# Altium PCB FlightController.PcbDoc
Units mm, origin at the board's own origin, x right, y up, seen from the top; angles counter-clockwise.
Board outline 33 x 33 mm, 4 copper layers (Top Layer, Layer 2, Layer 3, Bottom Layer), stack 0.603 mm thick; 42 components, 42 nets, 206 pads, 88 vias.
Unrouted connection lines stored in the file: 25.
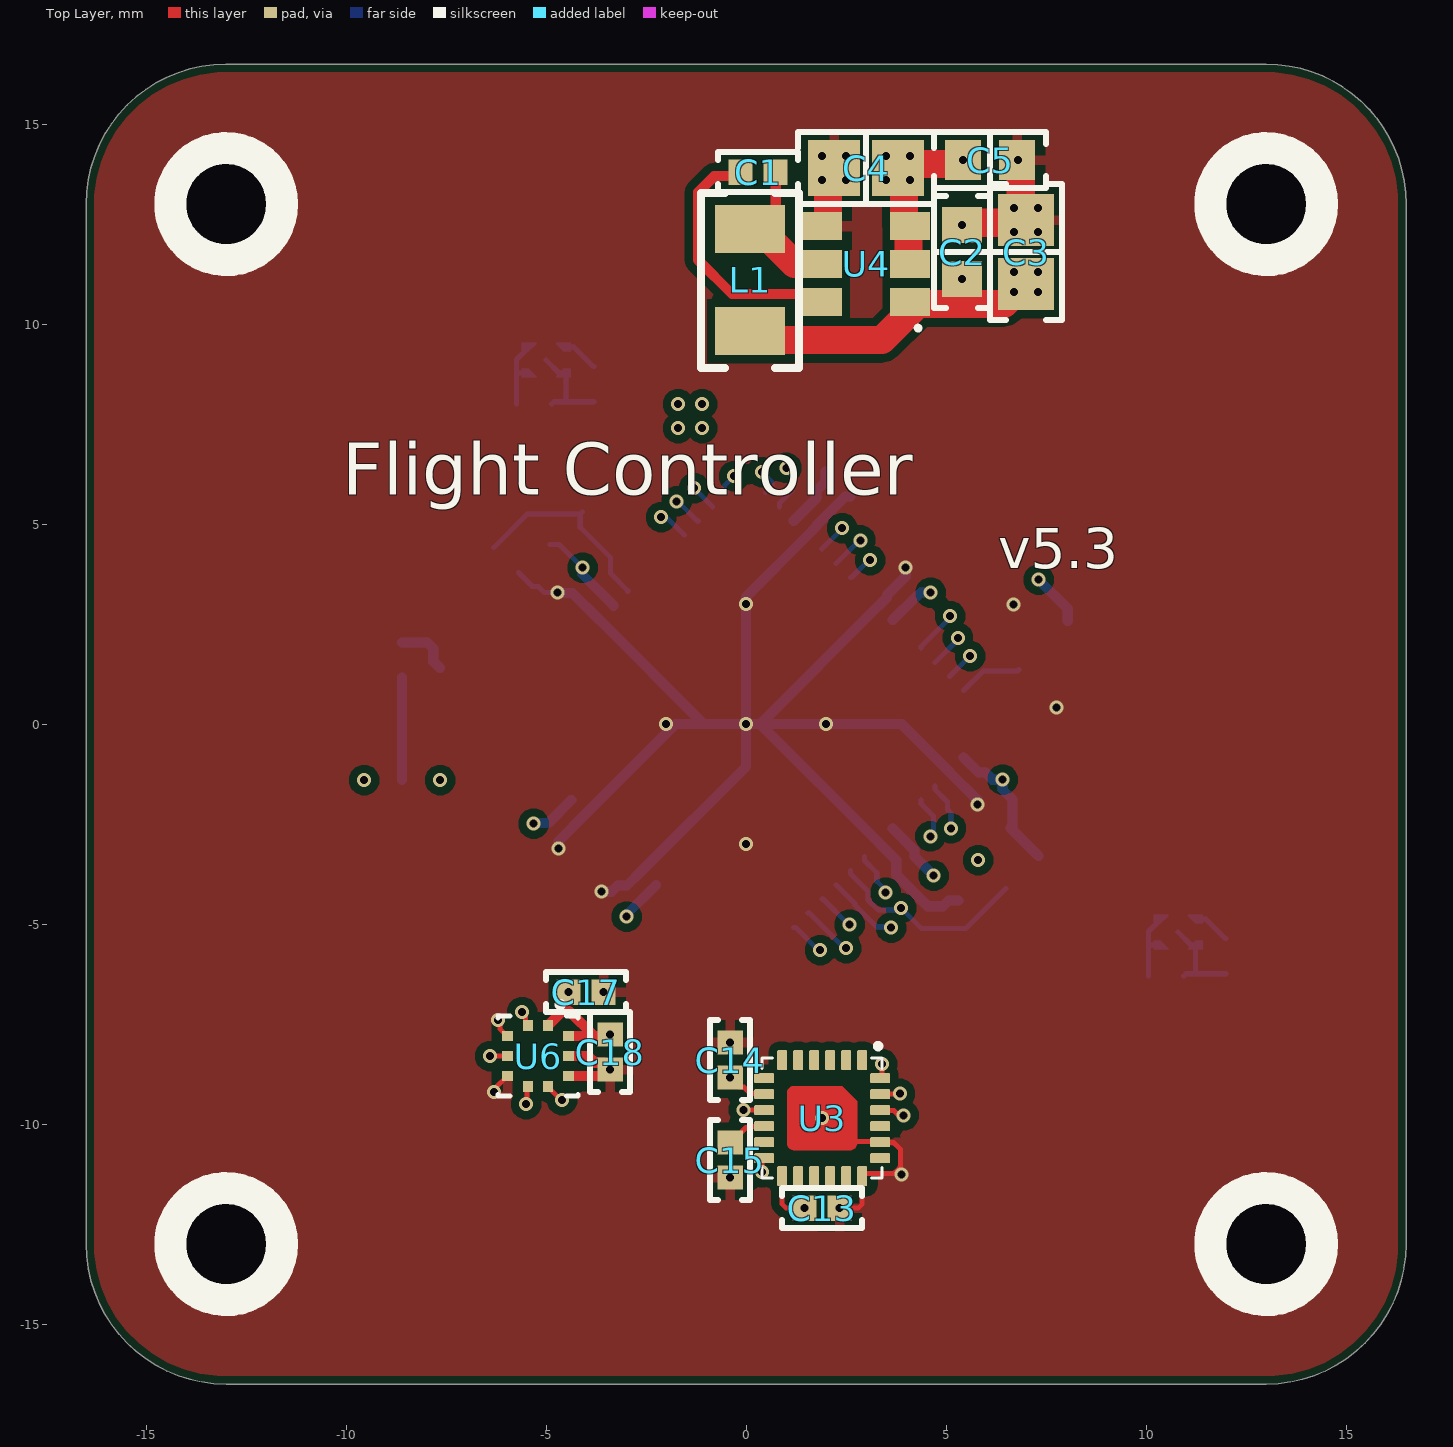
[diagram p0: Top Layer view]
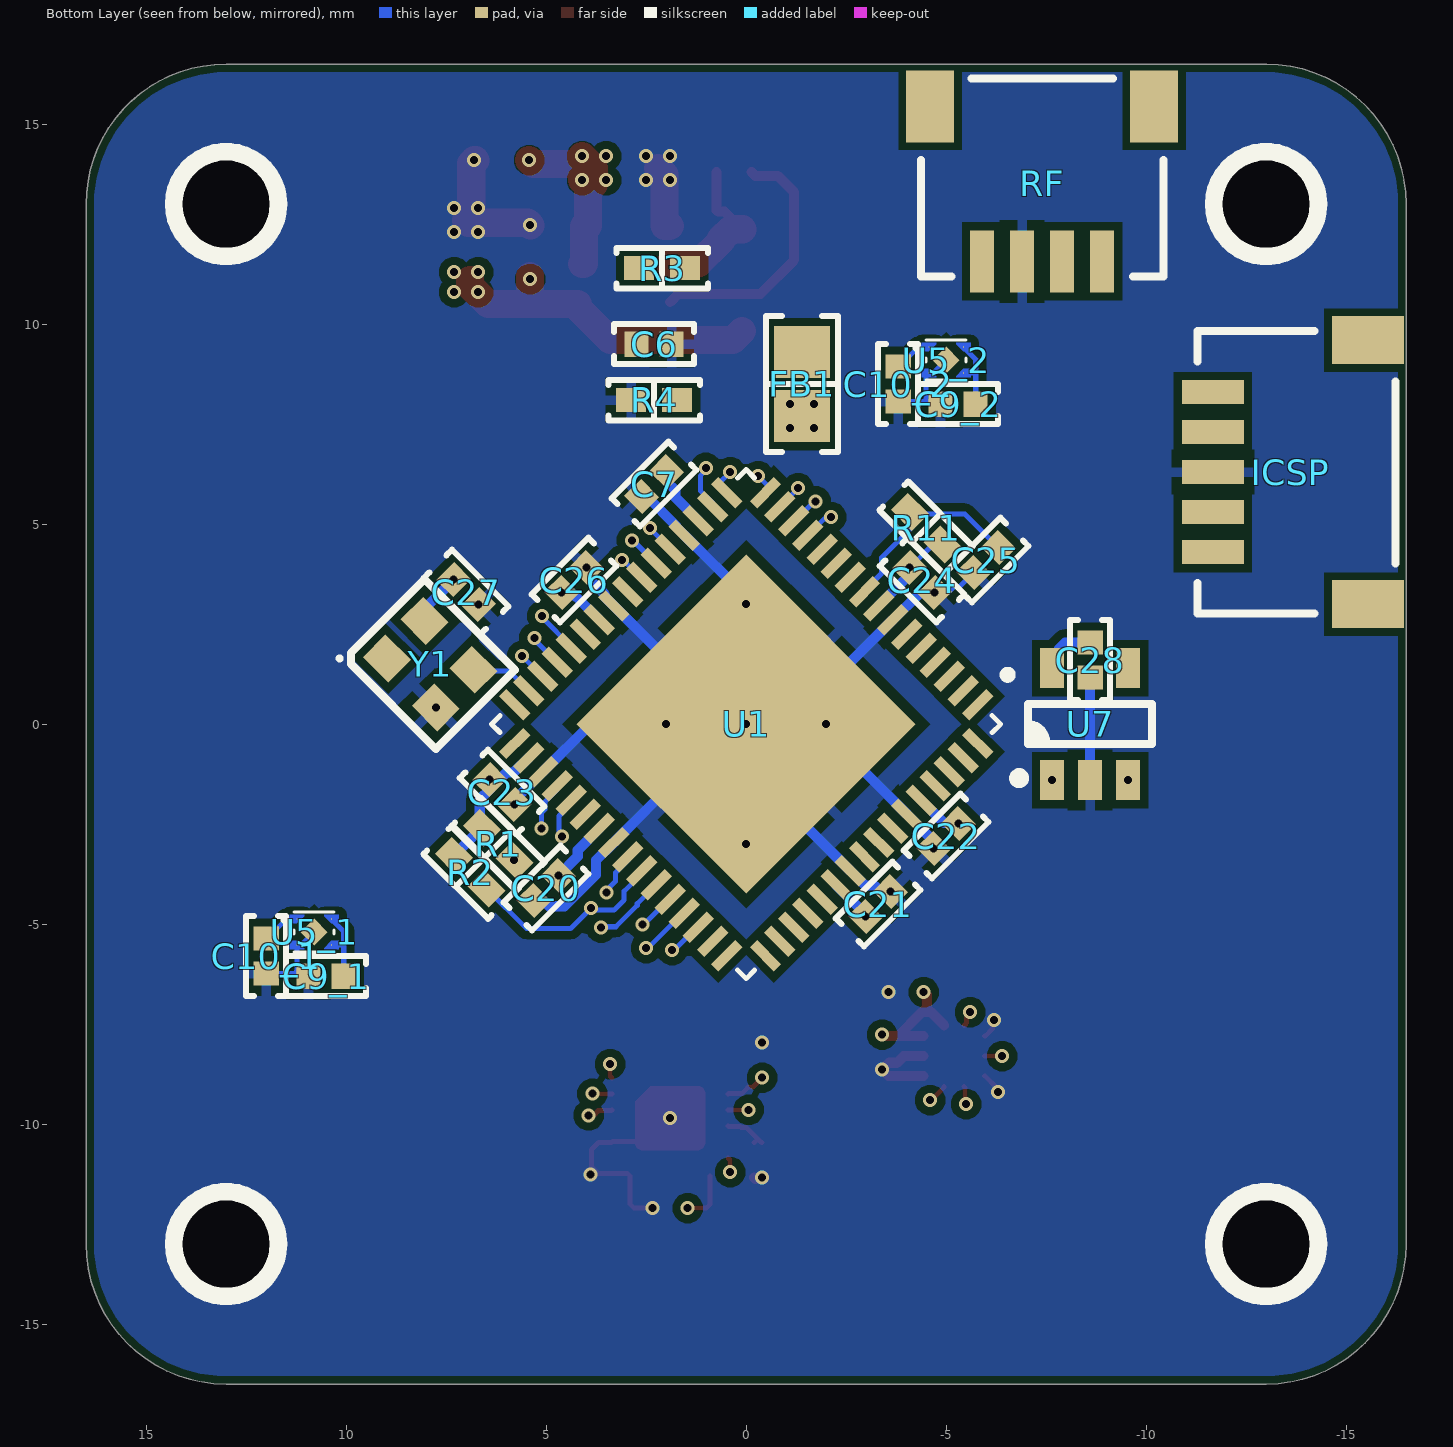
[diagram p1: Bottom Layer view, seen from below]
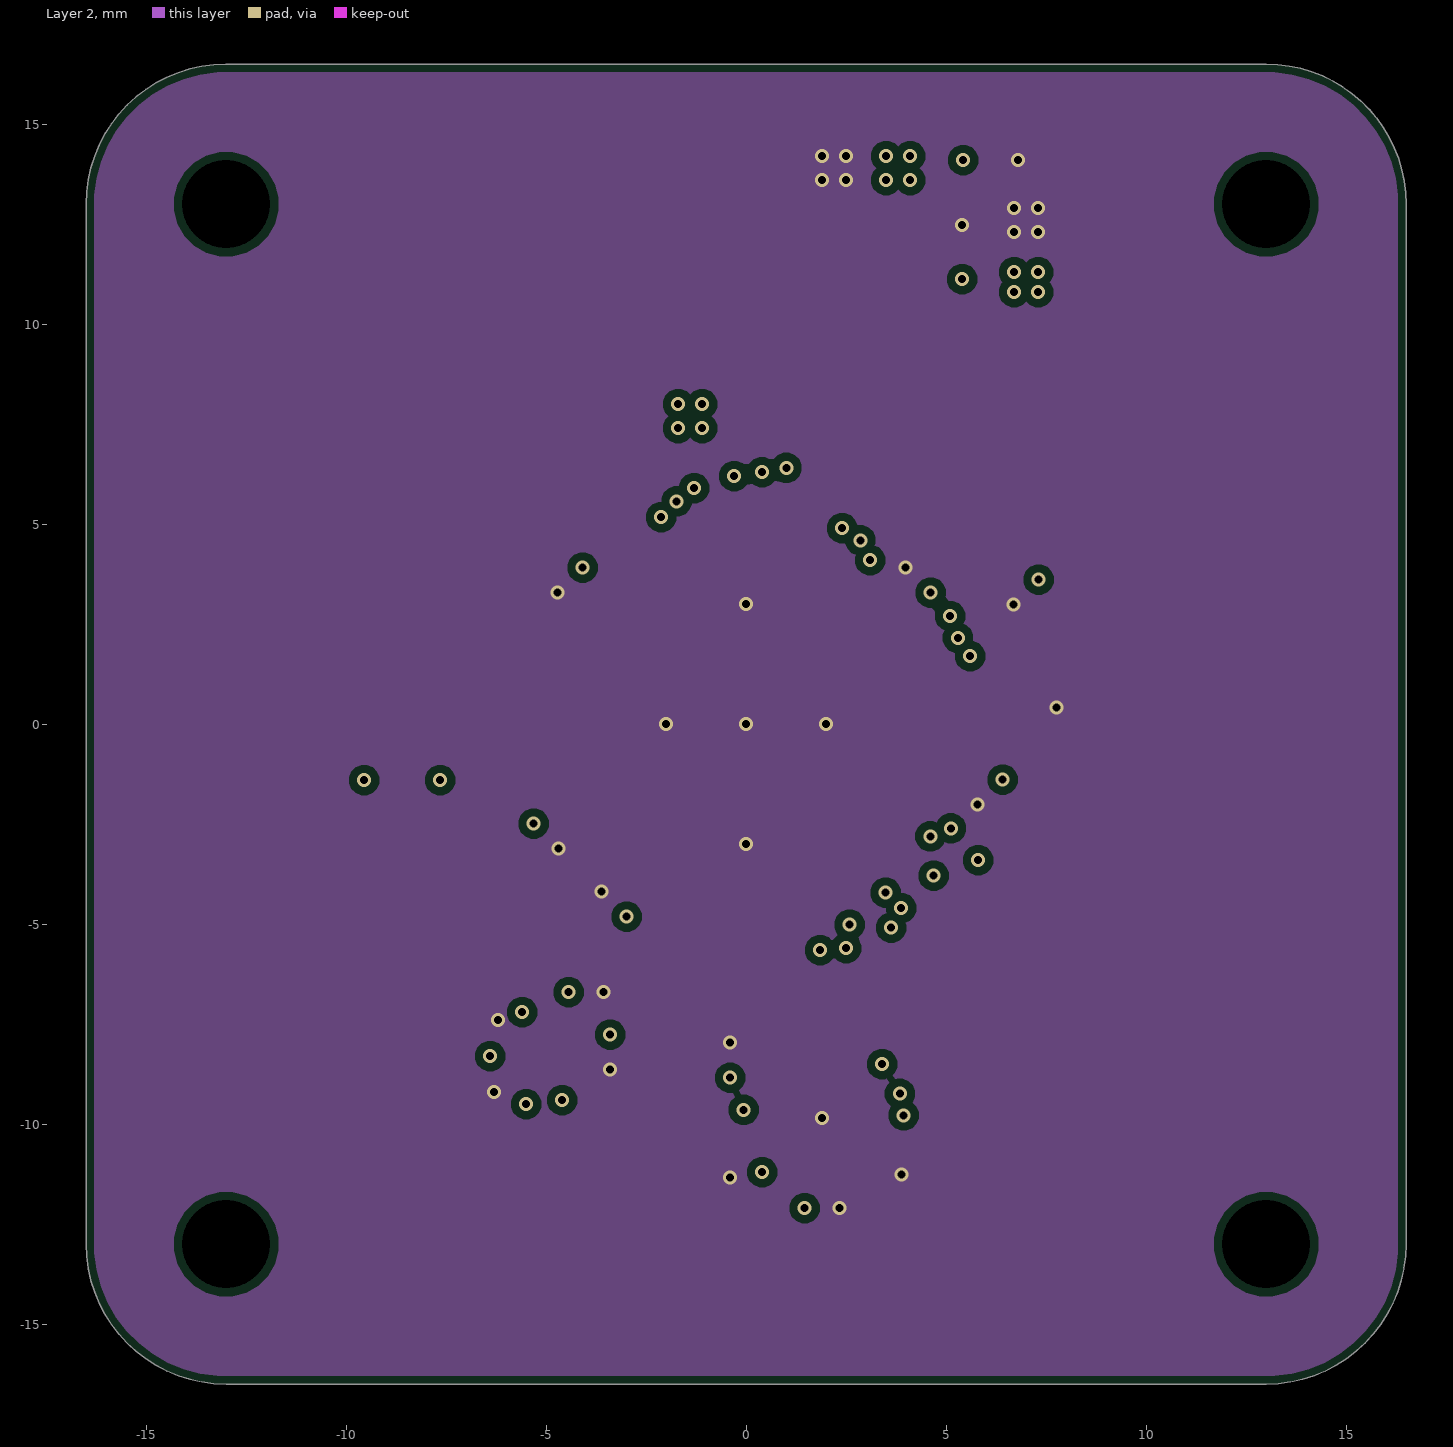
[diagram p2: Layer 2]
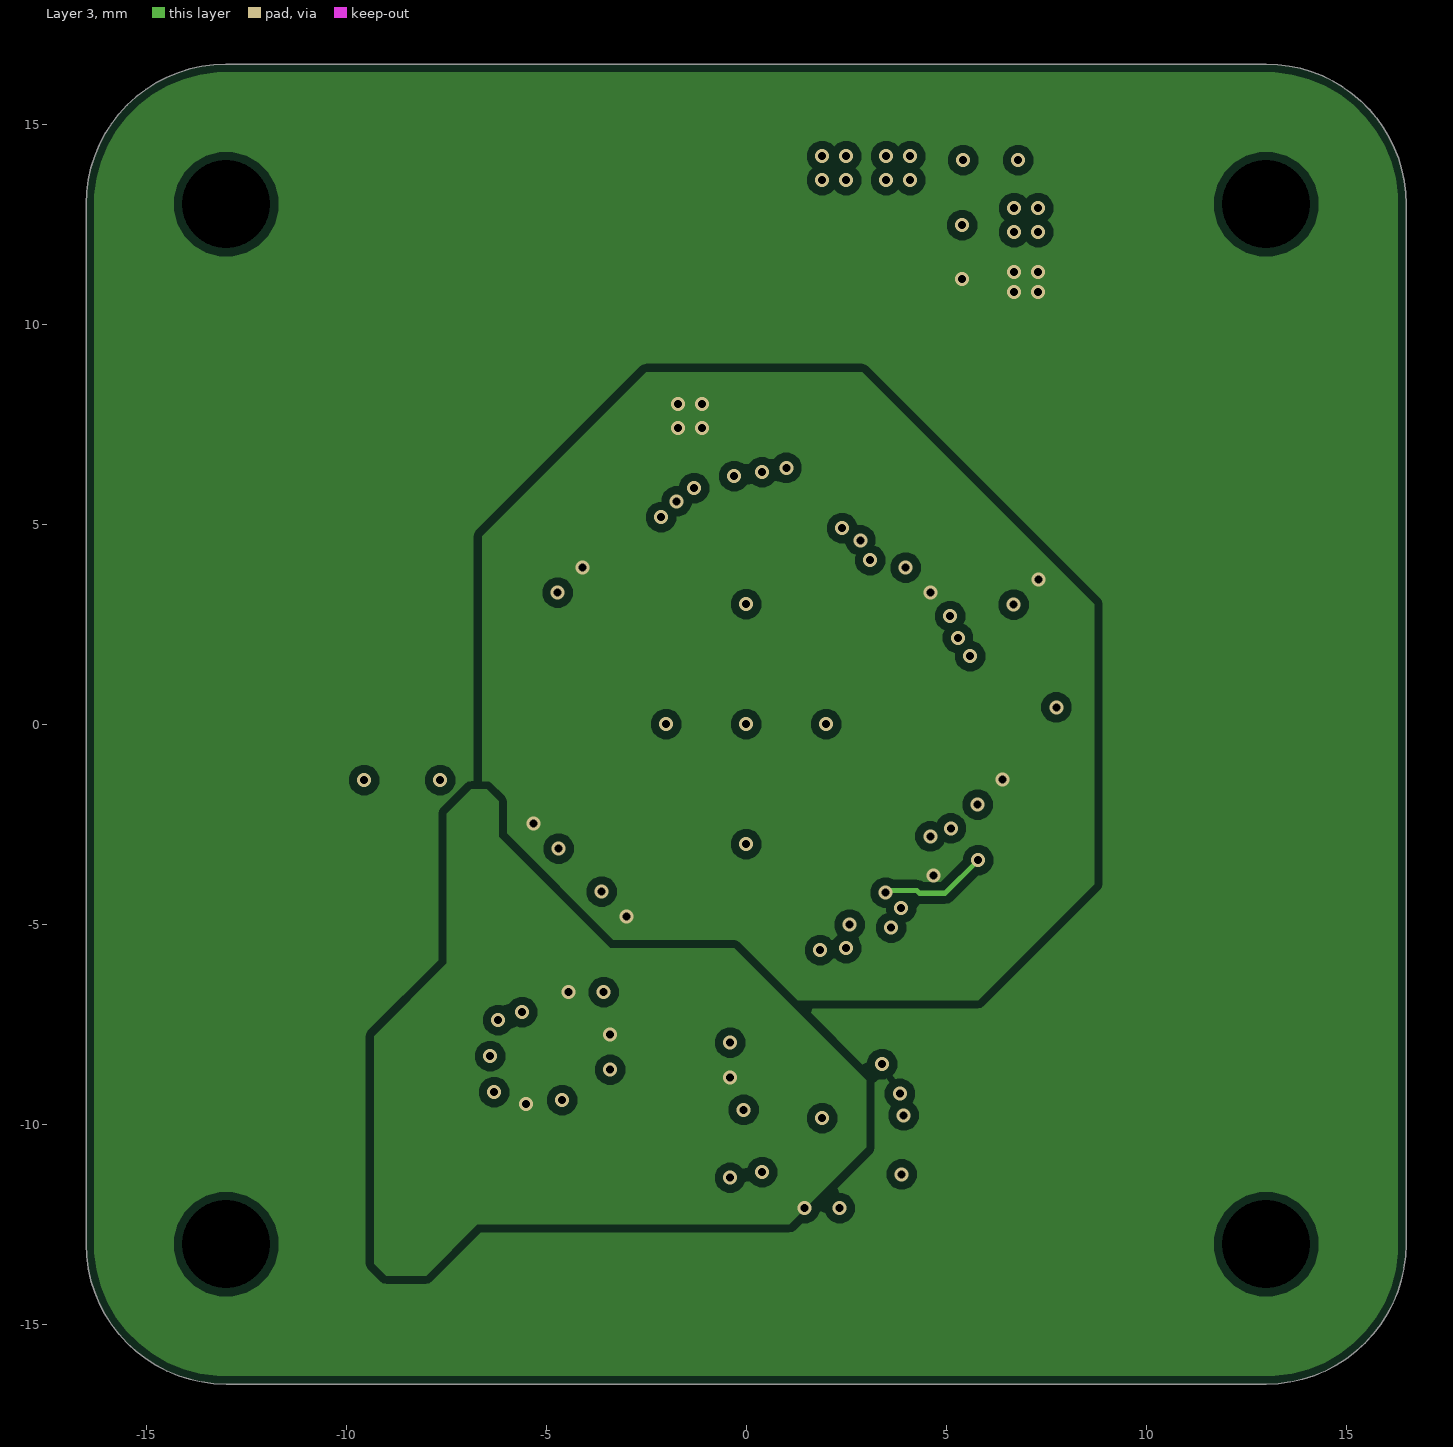
[diagram p3: Layer 3]

## Layer stack, top to bottom
Top Solder: solder mask 0.0102, Solder Resist, Dk 3.5
Top Layer: signal copper 0.0356
Dielectric 2: prepreg 0.0711, PP-006, Dk 4.1
Layer 2: signal copper 0.035
Dielectric 1: dielectric 0.32, FR-4, Dk 4.8
Layer 3: signal copper 0.035
Dielectric 3: prepreg 0.0711, PP-006, Dk 4.1
Bottom Layer: signal copper 0.0356
Bottom Solder: solder mask 0.0102, Solder Resist, Dk 3.5

## Board outline
-16.5,-13 -16.5,13 cw(c-13,13) -13,16.5 13,16.5 cw(c13,13) 16.5,13 16.5,-13 cw(c13,-13) 13,-16.5 -13,-16.5 cw(c-13,-13)

## Design rules (kind name [scope] priority, off if disabled: settings)
BoardOutlineClearance [All] p1: gap=0.2 ignorepadtopadclearanceinfootprint=FALSE
Clearance "PolyGon Pour Clearance" [InPolygon] p1: gap=0.2 ignorepadtopadclearanceinfootprint=FALSE
Clearance [All] p2: gap=0.2 ignorepadtopadclearanceinfootprint=TRUE except(0: Arc-Hole Track-Hole SMDPad-Hole THPad-Hole Via-Hole Fill-Hole Poly-Hole Region-Hole Text-Hole)
HoleSize [All] p1: absolutevalues=TRUE maxlimit=6.3 minlimit=0.02 maxpercent=80.000 minpercent=20.000
PolygonConnect PolygonRelief [IsPolygon and not (IsNamedPolygon('PolygonDirect'))] p1: thpad.connectstyle=Relief thpad.reliefconductorwidth=0.254 thpad.reliefentries=4 thpad.polygonreliefangle="90 Angle" thpad.airgapwidth=0.254 smdpad.connectstyle=Relief smdpad.reliefconductorwidth=0.254 smdpad.reliefentries=4 smdpad.polygonreliefangle="90 Angle" smdpad.airgapwidth=0.254 via.connectstyle=Direct via.reliefconductorwidth=0.254 via.reliefentries=4 via.polygonreliefangle="90 Angle" via.airgapwidth=0.254
PolygonConnect [All] p2: connectstyle=Direct reliefconductorwidth=0.254 reliefentries=4 polygonreliefangle="90 Angle" airgapwidth=0.254
RoutingVias [All] p1: holewidth=0.3 width=0.5 viastyle="Through Hole" minholewidth=0.2 minwidth=0.35 maxholewidth=0.7 maxwidth=1.27
SolderMaskExpansion [All] p1: expansion=0.102 istentingtop=FALSE
Width [All] p1: maxlimit=0.712 minlimit=0.127 preferedwidth=0.254
29 further rules are at their usual default settings.

## Classes and differential pairs
component class FlightController: C28 RF U7
component class U_ICM-20948: C13 C14 C15 U3
component class U_BMP390: C17 C18 U6
component class U_5V_BUCK_MCU: C1 C2 C3 C4 C5 L1 U4
component class U_PIC32MZ: C6 C7 C20 C21 C22 C23 C24 C25 C26 C27 FB1 ICSP R1 R2 R3 R4 R11 U1 Y1
component class U_3V3_LDO_MCU: C9_2 C10_2 U5_2
component class U_3V3_LDO_IMU: C9_1 C10_1 U5_1
channel class 3V3_LDO: U_3V3_LDO_IMU U_3V3_LDO_MCU

## Components (designator, comment, footprint, x,y, rotation, side; value= is the part's Value field where it differs from the comment)
C1 "1 µF" "CAP 0402_1005" 0.3,13.8 r0 top
C2 "1µF" "CAP 0603_1608" 5.4,11.8 r270 top
C3 "22µF" "CAP 0805_2012" 7,11.8 r270 top
C4 "22µF" "CAP 0805_2012" 3,13.9 r0 top
C5 "0.1µF" "CAP 0603_1608" 6.1,14.1 r0 top
C6 "0.01 µF" "CAP 0402_1005" 2.3,9.5 r180 bottom
C7 "0.1 µF" "CAP 0402_1005" 2.3,6 r135 bottom
C9_1 "2.2 µF" "CAP 0402_1005" 10.5,-6.3 r180 bottom (schematic designator C9)
C9_2 "2.2 µF" "CAP 0402_1005" -5.3,8 r180 bottom (schematic designator C9)
C10_1 "2.2 µF" "CAP 0402_1005" 12,-5.8 r90 bottom (schematic designator C10)
C10_2 "2.2 µF" "CAP 0402_1005" -3.8,8.5 r90 bottom (schematic designator C10)
C13 "0.1 µF" "CAP 0402_1005" 1.9,-12.1 r0 top
C14 "0.1 µF" "CAP 0402_1005" -0.4,-8.4 r90 top
C15 "0.1 µF" "CAP 0402_1005" -0.4,-10.9 r270 top
C17 "0.1 µF" "CAP 0402_1005" -4,-6.7 r180 top
C18 "0.1 µF" "CAP 0402_1005" -3.4,-8.2 r90 top
C20 "0.1 µF" "CAP 0402_1005" 5,-4.1 r135 bottom
C21 "0.1 µF" "CAP 0402_1005" -3.3,-4.5 r315 bottom
C22 "0.1 µF" "CAP 0402_1005" -5,-2.8 r135 bottom
C23 "0.1 µF" "CAP 0402_1005" 6.1,-1.7 r45 bottom
C24 "0.1 µF" "CAP 0402_1005" -4.4,3.6 r45 bottom
C25 "0.1 µF" "CAP 0402_1005" -6,4.1 r315 bottom
C26 "0.1 µF" "CAP 0402_1005" 4.3,3.6 r315 bottom
C27 "0.1 µF" "CAP 0402_1005" 7,3.3 r45 bottom
C28 "0.1 µF" "CAP 0402_1005" -8.6,1.6 r90 bottom
FB1 "Value" "FER 0805_2012" -1.4,8.5 r270 bottom
ICSP "SM05B-SRSS-TB(LF)(SN)" "JST SM05B-SRSS-TB" -13.7,6.3 r270 bottom
L1 "4.7µH" "IND 1008_2520" 0.1,11.1 r270 top
R1 "4.7k Ohms" "RES 0402_1005" 6.2,-3 r45 bottom
R2 "4.7k Ohms" "RES 0402_1005" 6.9,-3.7 r45 bottom
R3 "10k" "RES 0402_1005" 2.1,11.4 r0 bottom
R4 "2k" "RES 0402_1005" 2.3,8.1 r0 bottom
R11 "10k" "RES 0402_1005" -4.5,4.9 r225 bottom
RF "SM04B-SRSS-TB(LF)(SN)" "JST SM04B-SRSS-TB" -7.4,13.6 r180 bottom
U1 "PIC32MZ0512EFE064" QFN50P900X900X100-65N 0,0 r315 bottom
U3 "ICM-20948" ICM-20948 1.9,-9.85 r270 top
U4 "5V Buck" "TSOT-26-6 - 3.2mm" 3,11.5 r270 top
U5_1 "3.3V LDO" XDFN-4 10.8,-5.2 r180 bottom (schematic designator U5)
U5_2 "3.3V LDO" XDFN-4 -5,9.1 r180 bottom (schematic designator U5)
U6 "BMP390" BMP390L -5.2,-8.3 r0 top
U7 "24LC00" SOT-23-5 -8.6,0 r180 bottom
Y1 "27MHz" "ABRACON ASD" 7.9,1.5 r225 bottom

## Footprints (in the part's own frame and the unit in brackets; to place one, negate y for a bottom-side part, rotate by r counter-clockwise, add the part's x,y. Pads: shape width x height; smd on the part's side, far side on the other; paste and mask are expansions set on the pad)
"ABRACON ASD" [mm] "Crystal, 4-Leads, Body 2.00x2.45mm, Pitch 1.65mm, IPC Medium Density"
  rect 0.9x0.8 smd: 1(-0.865,-0.665) 2(0.865,-0.665) 3(0.865,0.665) 4(-0.865,0.665)
  silkscreen extent -1.75,-1.55 1.6,1.4, body extent -1.27,-1.02 1.28,1.03, height 1
BMP390L [mm]
  rect 0.25x0.275 smd: 1(0.25,0.763) 2(-0.25,0.763) 6(-0.25,-0.763) 7(0.25,-0.763)
  rect 0.275x0.25 smd: 3(-0.763,0.5) 4(-0.763,0) 5(-0.763,-0.5) 8(0.763,-0.5) 9(0.763,0) 10(0.763,0.5)
  silkscreen extent -1,-1 1,1.36, body extent -1,-1 1,1, height 0.75
"CAP 0402_1005" [mm] "Chip Capacitor, 2-Leads, Body 1.02x0.51mm, IPC Medium Density"
  rect 0.6x0.64 smd: 1(-0.44,0) 2(0.44,0)
  silkscreen extent -1,-0.5 1,0.5, body extent -0.5,-0.26 0.5,0.26, height 0.52
"CAP 0603_1608" [mm] "Chip Capacitor, 2-Leads, Body 1.60x0.80mm, IPC Medium Density"
  rect 0.9x1 smd: 1(-0.675,0) 2(0.675,0)
  silkscreen extent -1.4,-0.7 1.4,0.7, body extent -0.8,-0.41 0.8,0.41, height 0.82
"CAP 0805_2012" [mm] "Chip Capacitor, 2-Leads, Body 2.00x1.20mm, IPC Medium Density"
  rect 1.3x1.4 smd: 1(-0.8,0) 2(0.8,0)
  silkscreen extent -1.7,-0.9 1.7,0.9, body extent -1,-0.64 1,0.64, height 1.26
"FER 0805_2012" [mm] "Chip Ferrite, 2-Leads, Body 2.00x1.20mm, IPC Medium Density"
  rect 1.3x1.4 smd: 1(-0.8,0) 2(0.8,0)
  silkscreen extent -1.7,-0.9 1.7,0.9, body extent -1,-0.64 1,0.64, height 1.26
ICM-20948 [mm]
  rrect25% 0.5x0.25 smd: 1(-1.45,1) 2(-1.45,0.6) 3(-1.45,0.2) 4(-1.45,-0.2) 5(-1.45,-0.6) 6(-1.45,-1) 13(1.45,-1) 14(1.45,-0.6) 15(1.45,-0.2) 16(1.45,0.2) 17(1.45,0.6) 18(1.45,1)
  rrect25% 0.25x0.5 smd: 7(-1,-1.45) 8(-0.6,-1.45) 9(-0.2,-1.45) 10(0.2,-1.45) 11(0.6,-1.45) 12(1,-1.45) 19(1,1.45) 20(0.6,1.45) 21(0.2,1.45) 22(-0.2,1.45) 23(-0.6,1.45) 24(-1,1.45)
  round 0.025 smd: 25(0,0)
  Top Layer region: 0.625,-0.875 -0.625,-0.875 -0.692,-0.862 -0.749,-0.824 -0.786,-0.767 -0.8,-0.7 -0.8,-0.7 -0.8,0.5 -0.424,0.875 0.625,0.875 0.692,0.862 0.749,0.824 0.787,0.767 0.8,0.7 0.8,0.7 0.8,-0.7 0.787,-0.767 0.749,-0.824 0.692,-0.862 0.625,-0.875
  silkscreen extent -1.86,-1.5 1.5,1.5, body extent -1.5,-1.5 1.5,1.5, height 1.05
"IND 1008_2520" [mm] "Chip Inductance, 2-leads, Body 2.5x2.1mm, IPC Medium Density"
  rect 1.2x1.75 smd: 1(-1.275,0) 2(1.275,0)
  silkscreen extent -2.18,-1.22 2.2,1.22, body extent -1.3,-1.05 1.3,1.05, height 1
"JST SM04B-SRSS-TB" [mm] "1.0mm pitch/Disconnectable Crimp style connector"
  rect 0.6x1.55 smd: 1(-1.5,-2.032) 2(-0.5,-2.032) 3(0.5,-2.032) 4(1.5,-2.032)
  rect 1.2x1.8 smd: M(-2.8,1.843) M(2.8,1.843)
  silkscreen extent -3.03,-2.41 3.03,2.54, body extent -3,-2.38 3,2.57, height 2.95
"JST SM05B-SRSS-TB" [mm] "1.0mm pitch/Disconnectable Crimp style connector"
  rect 0.6x1.55 smd: 1(-2,-2.032) 2(-1,-2.032) 3(0,-2.032) 4(1,-2.032) 5(2,-2.032)
  rect 1.2x1.8 smd: M(-3.3,1.843) M(3.3,1.843)
  silkscreen extent -3.53,-2.41 3.53,2.54, body extent -3.5,-2.38 3.5,2.57, height 2.95
QFN50P900X900X100-65N [mm]
  rect 0.86x0.26 smd: 1(-4.435,3.75) 2(-4.435,3.25) 3(-4.435,2.75) 4(-4.435,2.25) 5(-4.435,1.75) 6(-4.435,1.25) 7(-4.435,0.75) 8(-4.435,0.25) 9(-4.435,-0.25) 10(-4.435,-0.75) 11(-4.435,-1.25) 12(-4.435,-1.75) 13(-4.435,-2.25) 14(-4.435,-2.75) 15(-4.435,-3.25) 16(-4.435,-3.75) 33(4.435,-3.75) 34(4.435,-3.25) 35(4.435,-2.75) 36(4.435,-2.25) 37(4.435,-1.75) 38(4.435,-1.25) 39(4.435,-0.75) 40(4.435,-0.25) 41(4.435,0.25) 42(4.435,0.75) 43(4.435,1.25) 44(4.435,1.75) 45(4.435,2.25) 46(4.435,2.75) 47(4.435,3.25) 48(4.435,3.75)
  rect 0.26x0.86 smd: 17(-3.75,-4.435) 18(-3.25,-4.435) 19(-2.75,-4.435) 20(-2.25,-4.435) 21(-1.75,-4.435) 22(-1.25,-4.435) 23(-0.75,-4.435) 24(-0.25,-4.435) 25(0.25,-4.435) 26(0.75,-4.435) 27(1.25,-4.435) 28(1.75,-4.435) 29(2.25,-4.435) 30(2.75,-4.435) 31(3.25,-4.435) 32(3.75,-4.435) 49(3.75,4.435) 50(3.25,4.435) 51(2.75,4.435) 52(2.25,4.435) 53(1.75,4.435) 54(1.25,4.435) 55(0.75,4.435) 56(0.25,4.435) 57(-0.25,4.435) 58(-0.75,4.435) 59(-1.25,4.435) 60(-1.75,4.435) 61(-2.25,4.435) 62(-2.75,4.435) 63(-3.25,4.435) 64(-3.75,4.435)
  rect 6x6 smd: 65(0,0)
  silkscreen extent -5.59,-4.5 4.5,4.5, body extent -4.52,-4.52 4.52,4.52, height 0.9
"RES 0402_1005" [mm] "Chip Resistor, 2-Leads, Body 1.0x0.5mm, IPC Medium Density"
  rect 0.75x0.6 smd: 1(-0.575,0) 2(0.575,0)
  silkscreen extent -1.14,-0.51 1.14,0.51, body extent -0.5,-0.25 0.5,0.25, height 0.35
SOT-23-5 [mm]
  rect 0.6x1 smd: 1(-0.95,-1.4) 2(0,-1.4) 3(0.95,-1.4) 4(0.95,1.4) 5(-0.95,1.4)
  silkscreen extent -1.9,-1.47 1.55,0.5, body extent -1.48,-1.44 1.42,1.39, height 1.5
"TSOT-26-6 - 3.2mm" [mm]
  rect 0.7x1 smd: 1(0.95,1.1) 2(0,1.1) 3(-0.95,1.1) 4(-0.95,-1.1) 5(0,-1.1) 6(0.95,-1.1)
  silkscreen extent 1.55,1.25 1.65,1.36, body extent -1.45,-1.2 1.45,1.2, height 1
XDFN-4 [mil]
  round 1 smd mask+2.56: 1(-16.93,12.79) 2(-16.93,-12.79) 3(16.93,-12.79) 4(16.93,12.79)
  rect 18.9x18.9 smd rot 135 mask+2.56: 5(0,0)
  Top Layer region: -16.93,8.65 -9.84,15.75 -9.84,16.93 -24.02,16.93 -24.02,8.65
  Top Layer region: -16.93,-8.65 -9.84,-15.75 -9.84,-16.93 -24.02,-16.93 -24.02,-8.65
  Top Layer region: 16.93,8.65 9.84,15.75 9.84,16.93 24.02,16.93 24.02,8.65
  Top Layer region: 16.93,-8.65 9.84,-15.75 9.84,-16.93 24.02,-16.93 24.02,-8.65
  silkscreen extent -31,-20 20,20, body extent -20,-20 20,20, height 16

## Part data
C1 C6 C9_1 C9_2 C10_1 C10_2: library part C0402C104K4RACAUTO, "CAP CER 0.1UF 16V X7R 0402", Capacitance="0.1 µF", Device Package="0402 (1005 Metric)", Manufacturer=KEMET, Operating Temperature="-55°C ~ 125°C", Ratings=AEC-Q200, Supplier Part Number 1=399-6828-1-ND, Temperature Coefficient=X7R, Tolerance=±10%, Voltage - Rated=16V, Applications="Automotive, Bypass, Decoupling", ComponentLink1Description=Datasheet, ComponentLink1URL=https://api.kemet.com/component-edge/download/specsheet/C0402C104K4RACAUTO.pdf, ComponentLink2Description="DigiKey Link", ComponentLink2URL=https://www.digikey.com/en/products/detail/kemet/C0402C104K4RACAUTO/3314827, LastUpdated="8/14/2022 9:05:51 PM", Lifecycle Status=Active, Minimum Order=1, Mounting Type="Surface Mount, MLCC", Package / Case="0402 (1005 Metric)", Packaging=TapeAndReel, Part Number=C0402C104K4RACAUTO, Part Status=Active, PartId=3024, Price=0.01, Series="SMD Auto X7R", Size / Dimension="0.039\" L x 0.020\" W (1.00mm x 0.50mm)", Supplier 1=DigiKey, Thickness (Max)="0.022\" (0.55mm)"
C2: library part GCJ188R71E105KA01D, "CAP CER 1UF 25V X7R 0603", Device Package="0603 (1608 Metric)", Manufacturer="Murata Electronics", Operating Temperature="-55°C ~ 125°C", Ratings=AEC-Q200, Supplier Part Number 1=490-14409-1-ND, Temperature Coefficient=X7R, Tolerance=±10%, Applications="Automotive, Boardflex Sensitive", Capacitance=1µF, ComponentLink1Description=Datasheet, ComponentLink1URL=https://search.murata.co.jp/Ceramy/image/img/A01X/G101/ENG/GCJ188R71E105KA01-01.pdf, ComponentLink2Description="DigiKey Link", ComponentLink2URL=http://digikey.com/product-detail/en/murata-electronics/GCJ188R71E105KA01D/490-14409-1-ND/6606870, Features="Soft Termination", LastUpdated="13-Aug-20 10:24:06 AM", Lifecycle Status=Active, Minimum Order=1, Mounting Type="Surface Mount, MLCC", Package / Case="0603 (1608 Metric)", Packaging=TapeAndReel, Part Number=GCJ188R71E105KA01D, Part Status=Active, PartId=9566, Price=0.05, Series=GCJ, Size / Dimension="0.063\" L x 0.031\" W (1.60mm x 0.80mm)", Supplier 1=DigiKey, Thickness (Max)="0.035\" (0.90mm)"
C3: library part CL21A226MOQNNNE, "CAP CER 22UF 16V X5R 0805", Device Package="0805 (2012 Metric)", Manufacturer="Samsung Electro-Mechanics", Operating Temperature="-55°C ~ 85°C", Supplier Part Number 1=1276-2909-1-ND, Temperature Coefficient=X5R, Tolerance=±20%, Voltage - Rated=16V, Applications="General Purpose", Capacitance=22µF, ComponentLink1Description=Datasheet, ComponentLink1URL=http://www.samsungsem.com/kr/support/product-search/mlcc/CL21A226MOQNNNE.jsp, ComponentLink2Description="DigiKey Link", ComponentLink2URL=http://digikey.com/product-detail/en/samsung-electro-mechanics/CL21A226MOQNNNE/1276-2909-1-ND/3890995, LastUpdated="21-Jan-20 12:03:05 AM", Lifecycle Status=Active, Minimum Order=1, Mounting Type="Surface Mount, MLCC", Package / Case="0805 (2012 Metric)", Packaging=TapeAndReel, Part Number=CL21A226MOQNNNE, Part Status=Active, PartId=3052, Price=0.11, Series=CL, Size / Dimension="0.079\" L x 0.049\" W (2.00mm x 1.25mm)", Supplier 1=DigiKey, Thickness (Max)="0.055\" (1.40mm)"
C4: library part C2012X7S1E106K125AC, "CAP CER 10UF 25V X7S 0805", Capacitance=10µF, Device Package="0805 (2012 Metric)", Manufacturer="TDK Corporation", Operating Temperature="-55°C ~ 125°C", Supplier Part Number 1=445-181600-1-ND, Temperature Coefficient=X7S, Tolerance=±10%, Voltage - Rated=25V, Applications="General Purpose", ComponentLink1Description=Datasheet, ComponentLink1URL=https://product.tdk.com/en/search/capacitor/ceramic/mlcc/info?part_no=C2012X7S1E106K125AC?ref_disty=digikey, ComponentLink2Description="DigiKey Link", ComponentLink2URL=http://digikey.com/product-detail/en/tdk-corporation/C2012X7S1E106K125AC/445-181600-1-ND/9991478, Features="Low ESL", LastUpdated="21-Jan-20 12:03:04 AM", Lifecycle Status=Active, Minimum Order=1, Mounting Type="Surface Mount, MLCC", Package / Case="0805 (2012 Metric)", Packaging=TapeAndReel, Part Number=C2012X7S1E106K125AC, Part Status=Active, PartId=3339, Price=0.15, Series=C, Size / Dimension="0.079\" L x 0.049\" W (2.00mm x 1.25mm)", Supplier 1=DigiKey, Thickness (Max)="0.057\" (1.45mm)"
C5: library part GCG188R92A104KA03D, "CAP CER 0.1UF 100V 0603 EPOXY", Device Package="0603 (1608 Metric)", Manufacturer="Murata Electronics", Operating Temperature="-55°C ~ 150°C", Ratings=AEC-Q200, Supplier Part Number 1=490-18197-1-ND, Temperature Coefficient=X8R, Tolerance=±10%, Voltage - Rated=100V, Applications=Automotive, Capacitance=0.1µF, ComponentLink1Description=Datasheet, ComponentLink1URL=https://search.murata.co.jp/Ceramy/image/img/A01X/G101/ENG/GCG188R92A104KA03-01.pdf, ComponentLink2Description="DigiKey Link", ComponentLink2URL=http://digikey.com/product-detail/en/murata-electronics/GCG188R92A104KA03D/490-18197-1-ND/9867926, Features="Epoxy Mountable", LastUpdated="21-Jan-20 12:01:59 AM", Lifecycle Status=Active, Minimum Order=1, Mounting Type="Surface Mount, MLCC, Epoxy", Package / Case="0603 (1608 Metric)", Packaging=TapeAndReel, Part Number=GCG188R92A104KA03D, Part Status=Active, PartId=9025, Price=0.07, Series=GCG, Size / Dimension="0.063\" L x 0.031\" W (1.60mm x 0.80mm)", Supplier 1=DigiKey, Thickness (Max)="0.035\" (0.90mm)"
C7 C13 C14 C15 C17 C18 C20 C21 C22 C23 C24 C25 C26 C27 C28: library part C0402C104K4RACAUTO, "CAP CER 0.1UF 16V X7R 0402", Device Package="0402 (1005 Metric)", Manufacturer=KEMET, Operating Temperature="-55°C ~ 125°C", Ratings=AEC-Q200, Supplier Part Number 1=399-6828-1-ND, Temperature Coefficient=X7R, Tolerance=±10%, Voltage - Rated=16V, Applications="Automotive, Bypass, Decoupling", Capacitance="0.1 µF", ComponentLink1Description=Datasheet, ComponentLink1URL=https://api.kemet.com/component-edge/download/specsheet/C0402C104K4RACAUTO.pdf, ComponentLink2Description="DigiKey Link", ComponentLink2URL=https://www.digikey.com/en/products/detail/kemet/C0402C104K4RACAUTO/3314827, LastUpdated="8/14/2022 9:05:51 PM", Lifecycle Status=Active, Minimum Order=1, Mounting Type="Surface Mount, MLCC", Package / Case="0402 (1005 Metric)", Packaging=TapeAndReel, Part Number=C0402C104K4RACAUTO, Part Status=Active, PartId=3024, Price=0.01, Series="SMD Auto X7R", Size / Dimension="0.039\" L x 0.020\" W (1.00mm x 0.50mm)", Supplier 1=DigiKey, Thickness (Max)="0.022\" (0.55mm)"
FB1: library part 2508051017Y0, "FERRITE BEAD 0805 1LN", Current Rating (Max)=300mA, DC Resistance (DCR) (Max)=200mOhm, Device Package="0805 (2012 Metric)", Manufacturer="Fair-Rite Products Corp.", Operating Temperature="-55°C ~ 125°C", Supplier Part Number 1=1934-1435-1-ND, ComponentLink1Description=Datasheet, ComponentLink1URL=http://www.fair-rite.com/wp-content/themes/fair-rite/print_product.php?pid=19091, ComponentLink2Description="DigiKey Link", ComponentLink2URL=http://digikey.com/product-detail/en/fair-rite-products-corp/2508051017Y0/1934-1435-1-ND/8594382, Filter Type="Signal Line", Height (Max)="0.043\" (1.10mm)", LastUpdated="9/2/2020 1:18:22 AM", Lifecycle Status=Active, Minimum Order=1, Mounting Type="Surface Mount", Number of Lines=1, Package / Case="0805 (2012 Metric)", Packaging=TapeAndReel, Part Number=2508051017Y0, Part Status=Active, PartId=1308, Price=0.02, Series=-, Size / Dimension="0.079\" L x 0.049\" W (2.00mm x 1.25mm)", Supplier 1=DigiKey
ICSP: "CONN HEADER SMD R/A 5POS 1MM", Current Rating (Amps)=0.7A, Insulation Color=Natural, Manufacturer="JST Sales America Inc.", Material Flammability Rating="UL94 V-0", Operating Temperature="-25°C ~ 85°C", Supplier Part Number 1=455-1805-1-ND, Voltage Rating=50V, ComponentLink1Description=Datasheet, ComponentLink1URL=http://www.jst-mfg.com/product/pdf/eng/eSH.pdf, ComponentLink2Description="DigiKey Link", ComponentLink2URL=http://digikey.com/product-detail/en/jst-sales-america-inc/SM05B-SRSS-TB-LF-SN/455-1805-1-ND/926876, Connector Type=Header, Contact Finish - Mating=Tin, Contact Finish - Post=Tin, Contact Material="Copper Alloy", Contact Shape=Square, Contact Type="Male Pin", Fastening Type=Push-Pull, Features="Solder Retention", Insulation Height="0.114\" (2.90mm)", Insulation Material="Polyamide (PA), Nylon", LastUpdated="1/12/2020 11:42:04 PM", Lifecycle Status=Active, Minimum Order=1, Mounting Type="Surface Mount, Right Angle", Number of Positions=5, Number of Positions Loaded=All, Number of Rows=1, Packaging=TapeAndReel, Part Number=SM05B-SRSS-TB(LF)(SN), Part Status=Active, PartId=63, Pitch - Mating="0.039\" (1.00mm)", Price=0.32, Series=SR, Shrouding="Shrouded - 4 Wall", Style="Board to Cable/Wire", Supplier 1=DigiKey, Termination=Solder
L1: library part MLP2520S4R7ST0S1, "FIXED IND 4.7UH 1A 110 MOHM SMD", Current Rating (Amps)=1A, DC Resistance (DCR)="143mOhm Max", Device Package="1008 (2520 Metric)", Inductance Frequency - Test=2MHz, Manufacturer="TDK Corporation", Operating Temperature="-40°C ~ 125°C", Supplier Part Number 1=445-6378-1-ND, Tolerance=±20%, ComponentLink1Description=Datasheet, ComponentLink1URL=https://product.tdk.com/info/en/catalog/datasheets/inductor_commercial_power_mlp2520_en.pdf?ref_disty=digikey, ComponentLink2Description="DigiKey Link", ComponentLink2URL=http://digikey.com/product-detail/en/tdk-corporation/MLP2520S4R7ST0S1/445-6378-1-ND/2465705, Height - Seated (Max)="0.039\" (1.00mm)", Inductance=4.7µH, LastUpdated="13-Aug-20 11:03:40 AM", Lifecycle Status=Active, Material - Core=Ferrite, Minimum Order=1, Mounting Type="Surface Mount", Package / Case="1008 (2520 Metric)", Packaging=TapeAndReel, Part Number=MLP2520S4R7ST0S1, Part Status=Active, PartId=3467, Price=0.14, Series=MLP, Shielding=Shielded, Size / Dimension="0.098\" L x 0.079\" W (2.50mm x 2.00mm)", Supplier 1=DigiKey, Supplier Device Package="1008 (2520 Metric)", Type=Multilayer
R1 R2 R3 R4 R11: library part CRCW0402330RJNEDC, "RES 330 OHM 5% 1/16W 0402", Device Package="0402 (1005 Metric)", Manufacturer="Vishay Dale", Operating Temperature="-55°C ~ 155°C", Power (Watts)="0.063W, 1/16W", Resistance="330 Ohms", Supplier Device Package=0402, Supplier Part Number 1=541-4123-1-ND, Temperature Coefficient=±200ppm/°C, Tolerance=±5%, ComponentLink1Description=Datasheet, ComponentLink1URL=http://www.vishay.com/docs/28773/crcwce3.pdf, ComponentLink2Description="DigiKey Link", ComponentLink2URL=https://www.digikey.com/en/products/detail/vishay-dale/CRCW0402330RJNEDC/7928545, Composition="Thick Film", Height - Seated (Max)="0.014\" (0.35mm)", LastUpdated="8/14/2022 9:23:31 PM", Lifecycle Status=Active, Minimum Order=1, Number of Terminations=2, Package / Case="0402 (1005 Metric)", Packaging=CutTape, Part Number=CRCW0402330RJNEDC, Part Status=Active, PartId=15989, Price=0.01, Series=CRCW-C, Size / Dimension="0.039\" L x 0.020\" W (1.00mm x 0.50mm)", Supplier 1=DigiKey
RF: "CONN HEADER SMD R/A 4POS 1MM", Current Rating (Amps)=0.7A, Insulation Color=Natural, Manufacturer="JST Sales America Inc.", Material Flammability Rating="UL94 V-0", Operating Temperature="-25°C ~ 85°C", Supplier Part Number 1=455-1804-1-ND, Voltage Rating=50V, ComponentLink1Description=Datasheet, ComponentLink1URL=http://www.jst-mfg.com/product/pdf/eng/eSH.pdf, ComponentLink2Description="DigiKey Link", ComponentLink2URL=http://digikey.com/product-detail/en/jst-sales-america-inc/SM04B-SRSS-TB-LF-SN/455-1804-1-ND/926875, Connector Type=Header, Contact Finish - Mating=Tin, Contact Finish - Post=Tin, Contact Material="Copper Alloy", Contact Shape=Square, Contact Type="Male Pin", Fastening Type=Push-Pull, Features="Solder Retention", Insulation Height="0.114\" (2.90mm)", Insulation Material="Polyamide (PA), Nylon", LastUpdated="1/12/2020 11:41:52 PM", Lifecycle Status=Active, Minimum Order=1, Mounting Type="Surface Mount, Right Angle", Number of Positions=4, Number of Positions Loaded=All, Number of Rows=1, Packaging=TapeAndReel, Part Number=SM04B-SRSS-TB(LF)(SN), Part Status=Active, PartId=62, Pitch - Mating="0.039\" (1.00mm)", Price=0.26, Series=SR, Shrouding="Shrouded - 4 Wall", Style="Board to Cable/Wire", Supplier 1=DigiKey, Termination=Solder
U1: library part PIC32MZ0512EFE064-I/PT, "32-bit Microcontrollers - MCU 32-BIT MCU 512KB FL 128KB RAM, No Crypto", Package="TQFP-64 Microchip", Availability=Unavailable, MF=Microchip, MP=PIC32MZ2048EFG064T-I/PT, Price=None, SnapEDA_Link=https://www.snapeda.com/parts/PIC32MZ2048EFG064T-I/PT/Microchip/view-part/565997/?ref=snap
U3: "9-DOF IMU"
U4: library part AP63205WU-7, "5V fixed step down Buck"
U5_1 U5_2: library part TLV74033PDQNR
U6: "Altimeter"
U7: "EEPROM"
Y1: library part ASD3-27.000MHZ-EC-T, "XTAL OSC XO 27.0000MHZ HCMOS SMD", Current - Supply (Max)=4mA, Frequency Stability=±50ppm, Manufacturer="Abracon LLC", Operating Temperature="-20°C ~ 70°C", Package / Case="4-SMD, No Lead", Supplier Part Number 1=535-9608-1-ND, Voltage - Supply=1.8V, Base Resonator=Crystal, ComponentLink1Description=Datasheet, ComponentLink1URL=https://abracon.com/Oscillators/ASDseries.pdf, ComponentLink2Description="DigiKey Link", ComponentLink2URL=http://digikey.com/product-detail/en/abracon-llc/ASD3-27.000MHZ-EC-T/535-9608-1-ND/1237075, Frequency=27MHz, Function=Enable/Disable, Height - Seated (Max)="0.039\" (1.00mm)", LastUpdated="9/14/2022 8:37:45 AM", Lifecycle Status=Active, Minimum Order=1, Mounting Type="Surface Mount", Output=HCMOS, Packaging=TapeAndReel, Part Number=ASD3-27.000MHZ-EC-T, Part Status=Active, PartId=4, Price=1.74, Series=ASD, Size / Dimension="0.098\" L x 0.079\" W (2.50mm x 2.00mm)", Supplier 1=DigiKey, Type="XO (Standard)"

## Free pads (board coordinates)
  round 1.524 hole 2.2: 1(-13,-13) 1(-13,13) 1(13,-13) 1(13,13)

## Via types
v1: diameter 0.35, hole 0.2, Top Layer to Bottom Layer, tented both sides, 88 vias

## Nets (pads, with @x,y where several pads share a name; then routed paths per layer and width w, separated by ;. In a path a pad name is that pad's centre, name@x,y a point inside that pad or via, vN(x,y) a via of type N, cw(c..) or ccw(c..) an arc to the next point about the centre after c; other vN are vias at no path point)
3V3: C10_2.2 C28.2 FB1.1 U5_2.1 U7.5 | length 2.4
  Bottom Layer w0.127: U5_2.1 -4.305,9.425 -3.82,8.94 C10_2.2
  Bottom Layer w0.254: C28.2 -7.972,2.04 -7.823,1.891 -7.823,1.573 U7.5
3V3_IMU: C10_1.2 C13.1 C14.1 C17.2 C18.2 U3.8 U3.13 U5_1.1 U6.1 U6.6 U6.10 | length 6.9
  Top Layer w0.127: v1(-5.5,-9.5) -5.475,-9.475 -5.475,-9.088 U6.6 ; v1(-0.4,-8.84) -0.163,-9.076 -0.053,-9.076 0.109,-9.239 0.439,-9.239 U3.8 ; U3.13 0.9,-12 1,-12.1 v1(1.46,-12.1)
  Top Layer w0.254: U6.1 -4.95,-7.529 -4.613,-7.192 -4.406,-7.192 -3.8,-7.798 ; -4.516,-7.192 -4.516,-6.776 v1(-4.44,-6.7) ; U6.10 -4.436,-7.798 -3.8,-7.798 ; v1(-3.4,-7.76) -3.438,-7.798 -3.8,-7.798
  Bottom Layer w0.127: U5_1.1 11.495,-4.875 11.98,-5.36 C10_1.2
5V: C2.2 C3.2 C9_1.2 C9_2.2 L1.2 RF.1 U4.1 U5_1.3 U5_1.4 U5_2.3 U5_2.4 | length 12.1
  Top Layer w0.7: L1.2 0.325,9.6 3.4,9.6 U4.1@4.2,10.4 ; U4.1@4.2,10.5 U4.1@4.2,10.4 ; C2.2@5.4,11.2 5.4,10.5 ; C3.2@6.9,11.1 6.9,10.95 6.45,10.5 5.4,10.5 ; U4.1@4.2,10.4 4.3,10.5 5.4,10.5
  Bottom Layer w0.127: C9_2.2 -5.74,8.8 ; U5_2.3 -5.715,8.775 -5.74,8.8 ; U5_2.4 -5.74,9.115 -5.74,8.8 ; C9_1.2 10.06,-5.5 ; U5_1.3 10.085,-5.525 10.06,-5.5 ; U5_1.4 10.06,-5.185 10.06,-5.5
  other v1: 6.7,10.8 7.3,10.8 5.4,11.125 6.7,11.3 7.3,11.3
12V: C4.2 C5.1 U4.2 U4.3 | length 4.8
  Top Layer w0.7: C4.2@3.955,14.055 4.01,14 5.325,14 v1(5.425,14.1) ; C4.2@3.956,13.744 4.056,13.744 4.1,13.7 v1(4.1,13.6) ; U4.3@4.044,12.45 3.95,12.45 3.95,13.35 3.8,13.5 C4.2 v1(4.1,14.2) ; U4.3@4.056,12.45 4.056,11.5 U4.2
  other v1: 3.5,13.6 3.5,14.2
BMP_INT: U1.52 U6.7 | length 0.5
  Top Layer w0.127: U6.7 -4.95,-9.075 -4.625,-9.4 v1(-4.6,-9.4)
BUCK_BST: C1.1 U4.6 | length 6.5
  Top Layer w0.254: C1.1 -0.24,13.7 -0.8,13.7 -1.2,13.3 -1.2,11.6 -0.352,10.752 1.698,10.752 U4.6
BUCK_SW: C1.2 L1.1 U4.5 | length 4
  Top Layer w0.254: L1.1 0.54,12.815 0.707,12.815 0.74,12.848 C1.2
  Top Layer w0.7: L1.1@0.619,12.095 1.214,11.5 U4.5
  Top Layer w0.712: L1.1 0.375,12.375 0.619,12.131 L1.1@0.619,12.095
ESC1: U1.21 | length 0.7
  Bottom Layer w0.127: U1.21 1.899,4.386 2.4,4.887 v1(2.4,4.9)
ESC2: U1.22 | length 0.8
  Bottom Layer w0.127: U1.22 2.825,4.593 v1(2.856,4.593)
ESC3: U1.18 | length 1.2
  Bottom Layer w0.127: U1.18 0.838,5.528 1.144,5.834 1.144,6.206 1.005,6.345 v1(1.005,6.405)
ESC4: U1.17 | length 0.7
  Bottom Layer w0.127: v1(0.4,6.3) 0.651,6.049 0.651,5.955 U1.17
GND: C2.1 C3.1 C4.1 C5.2 C6.2 C7.1 C9_1.1 C9_2.1 C10_1.1 C10_2.1 C13.2 C14.2 C15.2 C17.1 C18.1 C20.1 C21.1 C22.1 C23.1 C24.1 C25.2 C26.1 C27.1 C28.1 ICSP.3 R4.2 RF.2 U1.7 U1.20 U1.25 U1.35 U1.40 U1.55 U1.59 U1.65 U3.18 U3.20 U3.25 U4.4 U5_1.2 U5_1.5 U5_2.2 U5_2.5 U6.3 U6.5 U6.8 U6.9 U7.2 Y1.2 | length 65.2
  Top Layer w0.127: v1(-6.3,-9.2) -6.257,-9.157 -6.257,-9.082 -5.975,-8.8 U6.5 ; v1(-6.2,-7.4) -6.157,-7.443 -6.157,-7.618 -5.975,-7.8 U6.3 ; v1(1.9,-9.85) 1.9,-10.1 2.238,-10.439 3.339,-10.439 U3.20 3.362,-10.462 3.691,-10.462 3.864,-10.634 3.864,-11.066 3.691,-11.239 2.962,-11.239 U3.18 2.9,-12 2.8,-12.1 v1(2.34,-12.1)
  Top Layer w0.254: U6.8 -4.436,-8.798 -3.558,-8.798 v1(-3.4,-8.64) -3.573,-8.467 -3.775,-8.467 -3.942,-8.3 U6.9 ; C15.2@-0.23,-11.37 C15.2@-0.2,-11.34
  Top Layer w0.7: U4.4 2.038,12.45 2.044,12.456 2.044,13.744 C4.1
  Top Layer w0.712: v1(5.4,12.475) 5.463,12.538 6.937,12.538 C3.1 6.869,12.731 6.869,14.006 C5.2 v1(6.8,14.1)
  Bottom Layer w0.127: C25.2 -5.342,3.442 -5.199,3.442 -5.046,3.289 v1(-4.711,3.289) ; U5_2.5 -4.675,8.775 U5_2.2 -4.5,8.705 -4.5,8.06 ; C9_2.1 -4.8,8.06 -4.5,8.06 ; C10_2.1 -4.5,8.06 ; U5_1.5 11.125,-5.525 U5_1.2 11.23,-6.17 11.3,-6.24 ; C9_1.1 11,-6.24 11.3,-6.24 ; C10_1.1 11.3,-6.24
  Bottom Layer w0.254: U7.2 C28.1 ; v1(-4.711,3.289) -4.697,3.275 -4.339,3.275 -3.67,2.606 U1.7 U1.65@-1.061,0 ; v1(-4.689,-3.111) -4.689,-2.925 -4.02,-2.256 U1.59 -1.768,0 U1.65@-1.061,0 ; v1(-3.611,-4.189) -3.366,-4.189 -3.213,-4.036 -2.979,-4.036 -2.61,-3.666 U1.55 0,-1.061 v1(0,0) ; U1.65@0.349,0 3.309,2.959 U1.25 3.525,3.171 3.525,3.232 3.989,3.696 v1(3.989,3.911) ; C7.1 2.479,5.689 1.757,4.967 1.757,4.939 U1.20 0,3.182 v1(0,0) ; C20.1 5.066,-4.411 4.923,-4.554 4.539,-4.554 3.753,-3.768 3.753,-3.404 3.313,-2.963 U1.40 U1.65@0.354,0 ; v1(5.789,-2.011) 5.789,-1.904 5.081,-1.196 U1.35 3.889,0 U1.65@0.354,0 ; U1.65@-1.061,0 v1(0,0) ; v1(0,0) U1.65@0.354,0
  other v1: -0.4,-11.34 3.89,-11.254 -0.4,-7.96 -3.56,-6.7 0,-3 -2,0 2,0 7.759,0.418 0,3 6.689,2.989 6.7,12.3 7.3,12.3 6.7,12.9 7.3,12.9 1.9,13.6 2.5,13.6 1.9,14.2 2.5,14.2
GPS.RX: U1.43 | length 1.8
  Bottom Layer w0.127: U1.43 2.722,-4.49 2.722,-4.53 3.257,-5.065 3.598,-5.065 v1(3.623,-5.089)
GPS.TX: U1.46 | length 0.9
  Bottom Layer w0.127: U1.46 1.235,-5.081 1.805,-5.651 v1(1.849,-5.651)
I2C.SCL: R2.1 U1.42 U6.2 U7.1 | length 5.5
  Top Layer w0.127: v1(-5.6,-7.2) -5.6,-7.26 -5.512,-7.349 -5.512,-7.476 U6.2
  Bottom Layer w0.127: U1.42 2.606,-3.733 3.049,-4.176 3.049,-4.394 3.306,-4.651 3.767,-4.651 3.816,-4.601 v1(3.876,-4.601) 4.388,-5.113 5.487,-5.113 R2.1
  other v1: -7.65,-1.4
I2C.SDA: R1.1 U1.41 U6.4 U7.3 | length 4.3
  Top Layer w0.127: v1(-6.4,-8.3) U6.4
  Layer 3 w0.127: v1(3.488,-4.212) 3.548,-4.212 3.597,-4.163 4.271,-4.163 4.336,-4.227 4.973,-4.227 v1(5.8,-3.4)
  Bottom Layer w0.127: U1.41 2.959,-3.407 3.265,-3.713 3.265,-3.93 3.488,-4.152 v1(3.488,-4.212) ; R1.1 v1(5.8,-3.4)
  other v1: -9.55,-1.4
INT.INT_LIS3: U1.53
INT.INT_MPU: U1.51 U3.12 | length 0.4
  Top Layer w0.127: v1(0.4,-11.2) 0.4,-10.9 U3.12
MCLR: C25.1 ICSP.1 R11.1 U1.9 | length 5
  Bottom Layer w0.127: C25.1 -5.469,5.254 R11.1@-4.146,5.254 ; R11.1 R11.1@-4.146,5.254 ; U1.9 -2.959,3.335 -3.387,3.763 -3.387,4.16 -4.146,4.919 R11.1@-4.146,5.254
MCU_VDD: C7.2 C20.2 C21.2 C22.2 C23.2 C24.2 C26.2 C27.2 FB1.2 ICSP.2 R1.2 R2.2 R11.2 U1.8 U1.19 U1.26 U1.34 U1.39 U1.54 U1.60 Y1.4 | length 13.9
  Bottom Layer w0.127: R11.2 -4.671,4.493 v1(-4.089,3.911)
  Bottom Layer w0.254: v1(-5.311,-2.489) -5.297,-2.475 -4.95,-2.475 U1.60 ; v1(-4.089,3.911) -4.089,3.74 -3.313,2.963 U1.8 ; v1(-2.989,-4.811) -2.989,-4.761 -2.252,-4.024 U1.54 ; U1.19 1.191,5.085 1.763,5.656 1.763,5.84 1.989,6.066 C7.2 ; U1.39 3.666,-2.61 4.207,-3.151 4.207,-3.307 v1(4.689,-3.789) ; U1.26 4.239,3.178 4.256,3.178 4.366,3.289 v1(4.611,3.289) ; U1.34 5.438,-0.838 5.808,-1.207 5.985,-1.207 6.166,-1.389 v1(6.411,-1.389) 6.411,-1.634 6.66,-1.882 6.66,-2.54 R1.2 R2.2 ; v1(7.311,3.611) 8.041,2.881 Y1.4
  other v1: -1.7,7.4 -1.1,7.4 -1.7,8 -1.1,8
OSC: U1.31 Y1.3 | length 1.6
  Bottom Layer w0.127: U1.31 5.919,1.323 6.783,1.323 Y1.3
PGC: ICSP.5 U1.15 | length 0.7
  Bottom Layer w0.127: v1(-1.3,5.9) v1(-1.3,5.9) -0.838,5.436 U1.15
PGD: ICSP.4 U1.16 | length 0.5
  Bottom Layer w0.127: U1.16 -0.551,5.855 -0.551,5.949 v1(-0.3,6.2)
PWM_LED.B: U1.5
PWM_LED.G: U1.10
PWM_LED.R: U1.23 | length 0.7
  Bottom Layer w0.127: U1.23 2.636,3.666 3.07,4.1 v1(3.1,4.1)
REGOUT: C15.1 U3.10 | length 1
  Top Layer w0.127: C15.1 -0.38,-10.46 -0.002,-10.082 0.122,-10.082 0.142,-10.061 0.439,-10.061 U3.10 ; C15.1@-0.218,-10.442 C15.1@-0.2,-10.46
RF_DIN: RF.3 U1.30 | length 0.7
  Bottom Layer w0.127: U1.30 5.086,1.191 5.595,1.7 v1(5.6,1.7)
RF_DOUT: RF.4 U1.29 | length 0.8
  Bottom Layer w0.127: U1.29 5.295,2.113 v1(5.295,2.158)
RPM1: U1.13 | length 0.8
  Bottom Layer w0.127: v1(-2.124,5.176) -2.081,5.133 -1.951,5.133 U1.13
RPM2: U1.14 | length 0.8
  Bottom Layer w0.127: v1(-1.74,5.57) -1.71,5.57 -1.221,5.081 U1.14
RPM3: U1.49
RPM4: U1.50
SPI.C\S\: U3.22 | length 0.6
  Top Layer w0.127: U3.22 3.361,-9.661 3.691,-9.661 3.769,-9.74 3.893,-9.74 v1(3.936,-9.783)
SPI.MISO: U1.1 U3.9 | length 0.5
  Top Layer w0.127: v1(-0.06,-9.643) -0.057,-9.647 0.447,-9.647 U3.9
SPI.MOSI: U1.45 U3.24 | length 1.7
  Top Layer w0.127: U3.24 3.4,-8.8 v1(3.4,-8.5)
  Bottom Layer w0.127: U1.45 1.586,-4.727 2.459,-5.6 v1(2.5,-5.6)
SPI.SCK: U1.44 U3.23 | length 1.5
  Top Layer w0.127: U3.23 3.355,-9.245 3.842,-9.245 v1(3.847,-9.24)
  Bottom Layer w0.127: U1.44 1.922,-4.373 2.563,-5.014 v1(2.586,-5.014)
USB_D+: U1.37 | length 1.1
  Bottom Layer w0.127: U1.37 4.373,-1.993 4.679,-2.299 4.679,-2.671 4.605,-2.745 v1(4.605,-2.805)
USB_D-: U1.36 | length 1.2
  Bottom Layer w0.127: U1.36 4.727,-1.639 5.033,-1.945 5.033,-2.133 5.118,-2.218 v1(5.118,-2.606)
VBAT: R3.2
VBAT_ADC: C6.1 R3.1 R4.1 U1.28 | length 1.1
  Bottom Layer w0.127: U1.28 4.373,1.936 5.1,2.663 v1(5.1,2.7)
VBUS: U1.33
pads on no net: ICSP.M RF.M U1.2 U1.3 U1.4 U1.6 U1.11 U1.12 U1.24 U1.27 U1.32 U1.38 U1.47 U1.48 U1.56 U1.57 U1.58 U1.61 U1.62 U1.63 U1.64 U3.1 U3.2 U3.3 U3.4 U3.5 U3.6 U3.7 U3.11 U3.14 U3.15 U3.16 U3.17 U3.19 U3.21 U7.4 Y1.1

## Polygon pours and split planes (outlines as drawn)
5V on Layer 3 "5V_L03_P006" (solid, pour order 6): -16.5,16.5 -16.5,-16.5 16.5,-16.5 16.5,16.5
MCU_VDD on Layer 3 "MCU_VDD_L03_P004" (solid, pour order 4): -6.6,4.7 -2.5,8.8 2.9,8.8 8.7,3 8.7,-4 5.8,-6.9 0.9,-6.9 -0.4,-5.6 -3.4,-5.6 -6.6,-2.4
3V3_IMU on Layer 3 "3V3_IMU_L03_P002" (solid, pour order 2): -9.3,-13.488 -9.3,-7.8 -7.482,-5.982 -7.482,-2.236 -6.875,-1.629 -6.485,-1.629 -6.181,-1.933 -6.181,-2.819 -3.4,-5.6 -0.3,-5.6 3.004,-8.904 3.004,-10.584 1.084,-12.504 -6.716,-12.504 -8,-13.788 -9,-13.788
GND on Layer 2 "GND_L02_P005" (solid, pour order 5): -16.5,16.5 -16.5,-16.5 16.5,-16.5 16.5,16.5
GND on Top Layer "GND_L01_P001" (solid, pour order 1): -16.5,16.5 -16.5,-16.5 16.5,-16.5 16.5,16.5
GND on Bottom Layer "GND_L04_P000" (solid, pour order 0): -16.5,16.5 -16.5,-16.5 16.5,-16.5 16.5,16.5

## Silkscreen, mask and mechanical layers (free items; w line width, h text height)
Top Overlay:
  circle w0.8: c13,-13 r1.4
  circle w0.8: c-13,-13 r1.4
  circle w0.8: c13,13 r1.4
  circle w0.8: c-13,13 r1.4
  text "Flight Controller" at -10.1,5.733 h1.3
  text "v5.3" at 6.3,3.9 h1
Bottom Overlay:
  circle w0.44: c13,-13 r1.31
  circle w0.44: c-13,-13 r1.31
  circle w0.44: c13,13 r1.31
  circle w0.44: c-13,13 r1.31
Board:
  the board outline again, w0.127